# Altium PCB PCB1.PcbDoc
Units mm, origin at the board's own origin, x right, y up, seen from the top; angles counter-clockwise.
Board outline 42 x 41 mm, 4 copper layers (L1(SIGNAL), L2(GRD), L3(GND), L4 (SIGNAL)), stack 1.57 mm thick; 35 components, 27 nets, 169 pads, 0 vias.
Unrouted connection lines stored in the file: 53.
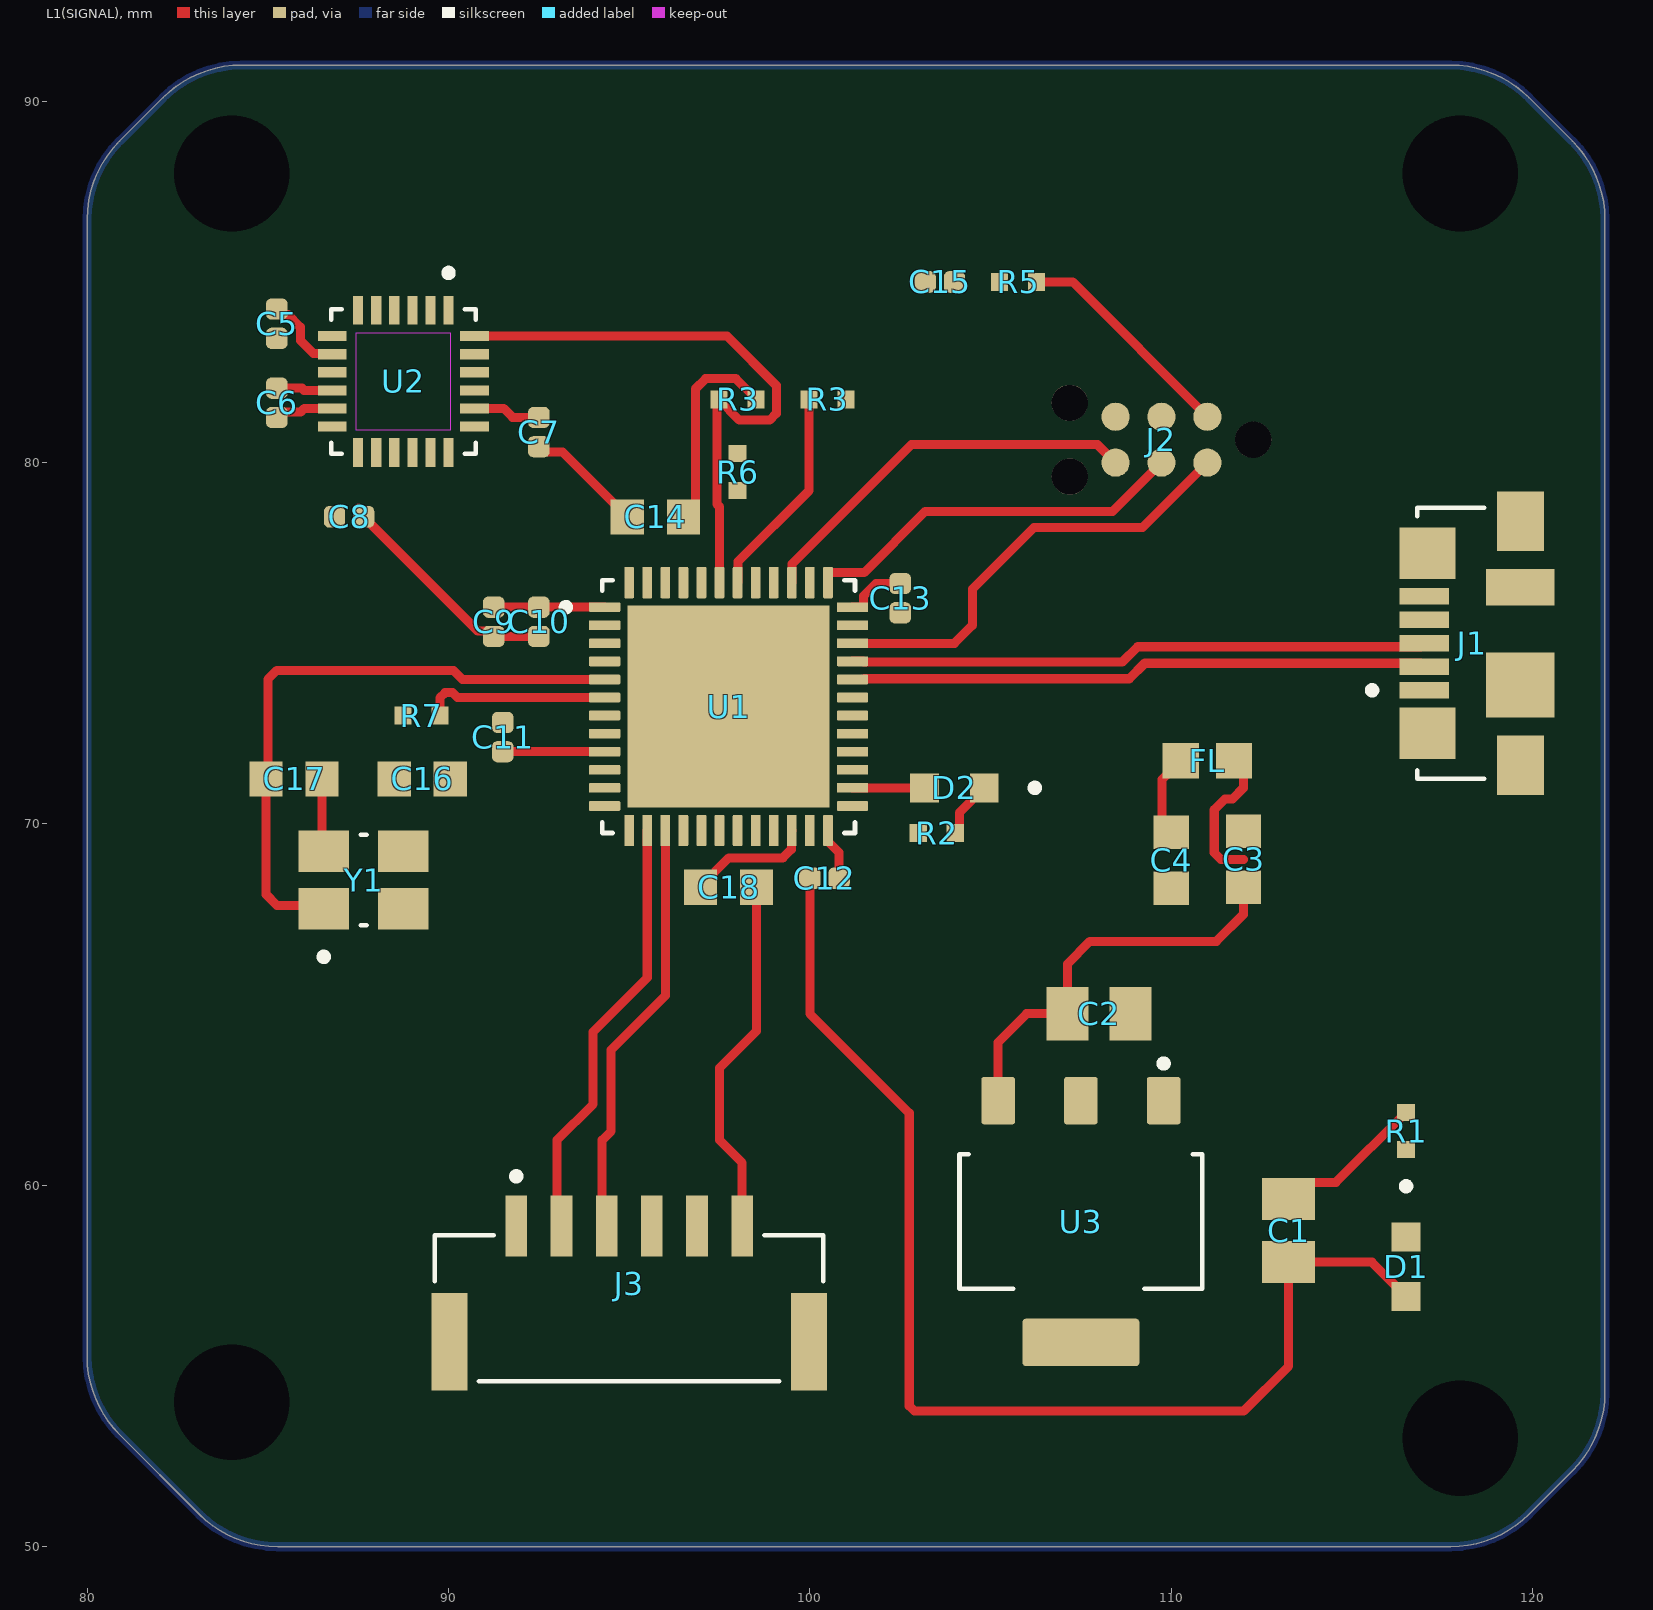
[diagram p0: L1(SIGNAL) view]
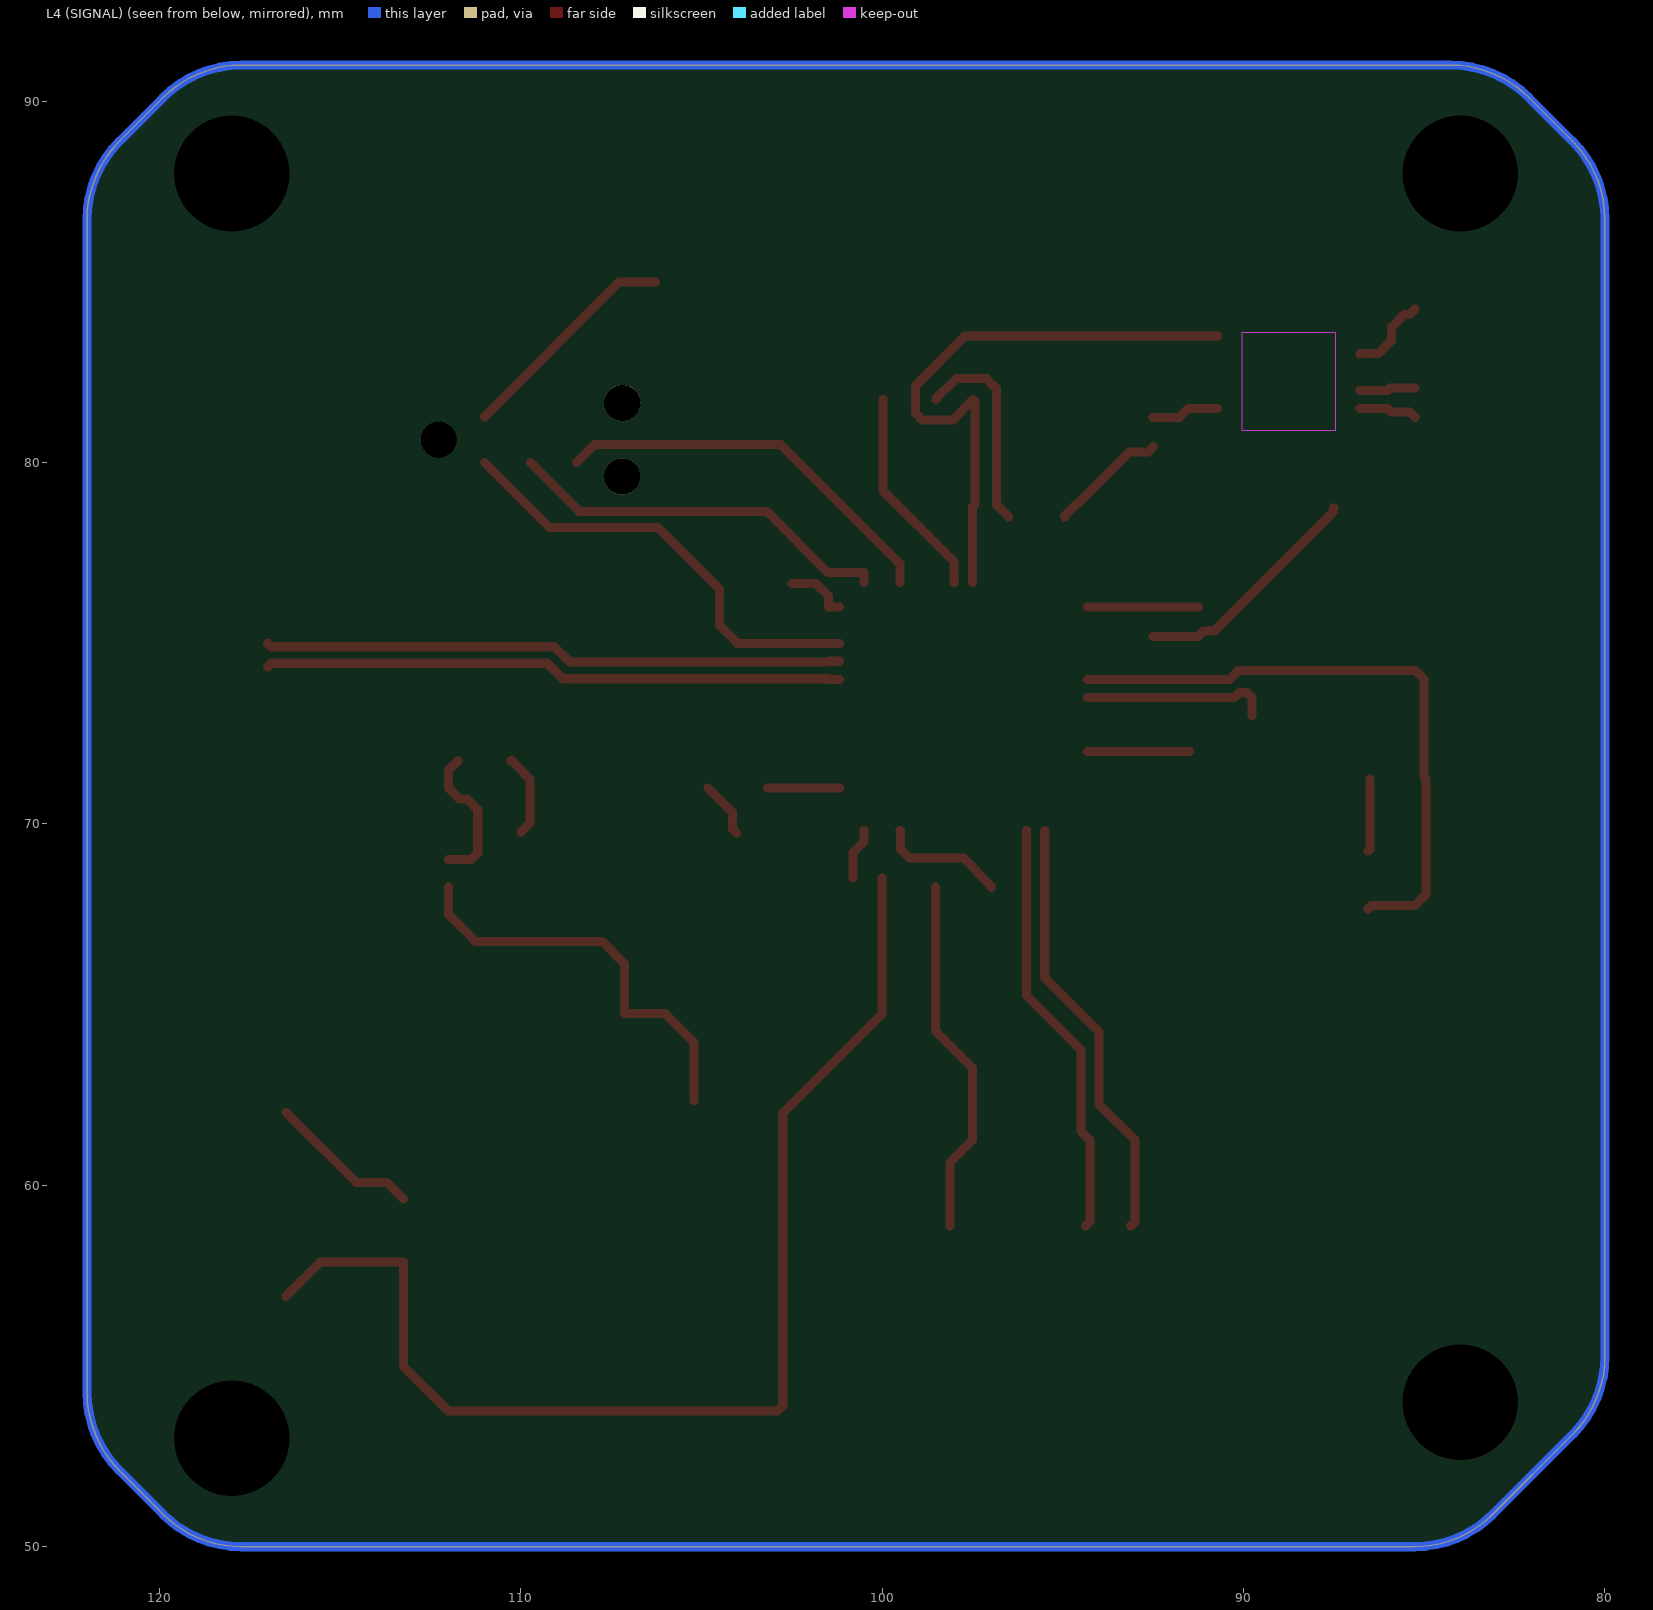
[diagram p1: L4 (SIGNAL) view, seen from below]

## Layer stack, top to bottom
Top Solder: solder mask 0.0254, SM-001, Dk 4
L1(SIGNAL): signal copper 0.035
Dielectric 1: prepreg 0.2, PP-017, Dk 4.6
L2(GRD): signal copper 0.0175
Dielectric 3: core 1.065, Core-039, Dk 4.6
L3(GND): signal copper 0.0175
Dielectric 5: prepreg 0.2, PP-017, Dk 4.6
L4 (SIGNAL): signal copper 0.035
Bottom Solder: solder mask 0.0254, SM-001, Dk 4

## Board outline
80.898,53.102 cw(c83.066,55.27) 80,55.27 80,86.73 cw(c83.066,86.73) 80.898,88.898 82.102,90.102 cw(c84.27,87.934) 84.27,91 117.73,91 cw(c117.73,87.934) 119.898,90.102 121.102,88.898 cw(c118.934,86.73) 122,86.73 122,54.27 cw(c118.934,54.27) 121.102,52.102 119.898,50.898 cw(c117.73,53.066) 117.73,50 85.27,50 cw(c85.27,53.066) 83.102,50.898

## Design rules (kind name [scope] priority, off if disabled: settings)
Clearance [All] p1: gap=0.2 ignorepadtopadclearanceinfootprint=FALSE
DiffPairsRouting [All] p1: maxlimit=0.254 minlimit=0.203 mostfreqgap=0.254 toplayer_maxgap=0.203 toplayer_prefgap=0.203 toplayer_minwidth=0.26 toplayer_maxwidth=0.26 toplayer_prefwidth=0.26 bottomlayer_maxgap=0.203 bottomlayer_prefgap=0.203 bottomlayer_minwidth=0.26 bottomlayer_maxwidth=0.26 bottomlayer_prefwidth=0.26 impedanceprofiledriven=TRUE impedanceprofileid={26B8F111-8DEA-43AA-B8F9-D71FA04D63BC} impedanceprofilevalue=90.000000 maxuncoupledlength=12.7
PolygonConnect [All] p1: connectstyle=Direct reliefconductorwidth=0.254 reliefentries=4 polygonreliefangle="90 Angle" airgapwidth=0.254
RoutingVias [All] p1: holewidth=0.3 width=0.7 viastyle="Through Hole" minholewidth=0.25 minwidth=0.55 maxholewidth=0.4 maxwidth=0.9
SolderMaskExpansion [All] p1: expansion=0.102 istentingtop=FALSE
SupplyNets "Schematic Supply Nets_4" [InNet('LED PWR K')] p1: voltage=0.000
SupplyNets "Schematic Supply Nets_3" [InNet('+3V3')] p2: voltage=0.000
SupplyNets "Schematic Supply Nets_1" [InNet('VBUS')] p3: voltage=0.000
SupplyNets "Schematic Supply Nets" [InNet('+5')] p4: voltage=0.000
UnRoutedNet [All] p1: checkbadconnections=TRUE
Width [All] p1: maxlimit=1 minlimit=0.2 preferedwidth=0.3 midlayer1_minwidth=0.254 midlayer1_maxwidth=0.254 midlayer1_prefwidth=0.254 midlayer2_minwidth=0.254 midlayer2_maxwidth=0.254 midlayer2_prefwidth=0.254 minimp=50.000000 maximp=50.000000 favimp=50.000000
28 further rules are at their usual default settings.

## Classes and differential pairs
differential pair class *DEF-USB: USB_D
differential pair USB_D: +USB_D_P -USB_D_N

## Components (designator, comment, footprint, x,y, rotation, side; value= is the part's Value field where it differs from the comment)
C1 "22U" CAPC2012X88N 113.25,58.75 r90 top
C2 "22U" CAPC2012X88N 108,64.75 r0 top
C3 "2u2" CAPC1608X90N 112,69.025 r90 top
C4 "2u2" CAPC1608X90N 110,69 r270 top
C5 "10n" CAPC1005X55N 85.25,83.845 r90 top
C6 "100n" CAPC1005X55N 85.25,81.655 r90 top
C7 "2n2" CAPC1005X55N 92.5,80.845 r270 top
C8 "100n" CAPC1005X55N 87.25,78.5 r0 top
C9 "2u2" CAPC1005X55N 91.25,75.595 r270 top
C10 "100n" CAPC1005X55N 92.5,75.595 r270 top
C11 "100n" CAPC1005X55N 91.5,72.405 r90 top
C12 "100n" CAPC1005X55N 100.405,68.5 r180 top
C13 "100n" CAPC1005X55N 102.5,76.25 r270 top
C14 "100n" CAPC1608X90N 95.725,78.5 r180 top
C15 "100n" CAPC1005X55N 103.595,85 r180 top
C16 "10p" CAPC1608X90N 89.275,71.25 r180 top
C17 "10p" CAPC1608X90N 85.725,71.25 r180 top
C18 "2u2" CAPC1608X90N 97.75,68.25 r180 top
D1 "KPT-1608EC" LED_KPT-1608EC 116.5,57.75 r270 top
D2 "KPT-1608EC" LED_KPT-1608EC 104,71 r180 top
FL "130R" BEADC1608X95N 111,71.75 r180 top
J1 "47346-0001" MOLEX_47346-0001 119.66,75 r90 top
J2 "TC2030-MCP-NL" TC2030-MCP-NL 111,81.27 r180 top
J3 "SM06B-GHS-TB" JST_SM06B-GHS-TB 95,57 r0 top
R1 "1k" RES_ERJU02F3600X 116.5,61.5 r270 top
R2 "1k" RES_ERJU02F3600X 103.512,69.75 r0 top
R3 "2K2" RES_ERJU02F3600X 100.488,81.75 r0 top
R3 "2K2" RES_ERJU02F3600X 98,81.75 r0 top
R5 "10K" RES_ERJU02F3600X 105.762,85 r0 top
R6 "10K" RES_ERJU02F3600X 98,79.738 r270 top
R7 "0" RES_ERJU02F3600X 89.25,73 r180 top
U1 "STM32F411CEU6" QFN50P700X700X60-49N 97.75,73.25 r0 top
U2 "MPU-6050-A" QFN50P400X400X95-24N 88.75,82.25 r270 top
U3 "AMS1117-3.3" SOT229P700X180-4N 107.5,59 r180 top
Y1 "24MHz" XTAL_TSX-3225_24.0000MF15V-C0 87.65,68.45 r90 top

## Footprints (in the part's own frame and the unit in brackets; to place one, negate y for a bottom-side part, rotate by r counter-clockwise, add the part's x,y. Pads: shape width x height; smd on the part's side, far side on the other; paste and mask are expansions set on the pad)
BEADC1608X95N [mm]
  rect 1x0.97 smd: 1(-0.735,0) 2(0.735,0)
CAPC1005X55N [mm]
  rrect53% 0.59x0.6 smd: 1(-0.405,0) 2(0.405,0)
  body extent -0.5,-0.25 0.5,0.25, height 0.55
CAPC1608X90N [mm]
  rect 0.92x0.97 smd: 1(-0.775,0) 2(0.775,0)
  body extent -0.8,-0.4 0.8,0.4, height 0.95
CAPC2012X88N [mm]
  rect 1.16x1.47 smd: 1(-0.875,0) 2(0.875,0)
  body extent -1.02,-0.64 1.02,0.64, height 1.4
JST_SM06B-GHS-TB [mm]
  rect 0.6x1.7 smd paste+0 mask+0.102: 1(-3.125,1.875) 2(-1.875,1.875) 3(-0.625,1.875) 4(0.625,1.875) 5(1.875,1.875) 6(3.125,1.875)
  rect 1x2.7 smd paste+0 mask+0.102: MP1(-4.975,-1.325) MP2(4.975,-1.325)
  silkscreen extent -5.38,-2.42 5.38,3.35, body extent -5.38,-2.05 5.38,2.8, height 4.25
LED_KPT-1608EC [mm]
  rect 0.8x0.8 smd paste+0 mask+0.102: A(0.825,0) C(-0.825,0)
  silkscreen extent -2.32,-0.1 -2.13,0.1, body extent -0.8,-0.4 0.8,0.4, height 0.75
MOLEX_47346-0001 [mm]
  rect 0.45x1.38 smd: 1(-1.3,2.66) 2(-0.65,2.66) 3(0,2.66) 4(0.65,2.66) 5(1.3,2.66)
  rect 1.425x1.55 smd: S1(-2.488,2.575) S2(2.488,2.575)
  rect 1.65x1.3 smd: S3(-3.375,0) S6(3.375,0)
  rect 1.8x1.9 smd: S4(-1.15,0)
  rect 1x1.9 smd: S5(1.55,0)
  silkscreen extent -3.75,1 3.75,4.2
QFN50P400X400X95-24N [mm]
  rect 0.79x0.28 smd: 1(-1.97,1.25) 2(-1.97,0.75) 3(-1.97,0.25) 4(-1.97,-0.25) 5(-1.97,-0.75) 6(-1.97,-1.25) 13(1.97,-1.25) 14(1.97,-0.75) 15(1.97,-0.25) 16(1.97,0.25) 17(1.97,0.75) 18(1.97,1.25)
  rect 0.28x0.79 smd: 7(-1.25,-1.97) 8(-0.75,-1.97) 9(-0.25,-1.97) 10(0.25,-1.97) 11(0.75,-1.97) 12(1.25,-1.97) 19(1.25,1.97) 20(0.75,1.97) 21(0.25,1.97) 22(-0.25,1.97) 23(-0.75,1.97) 24(-1.25,1.97)
  Keep-Out Layer region: 1.35,-1.3 -1.35,-1.3 -1.35,1.3 1.35,1.3
  silkscreen extent -3.1,-2 2,2
QFN50P700X700X60-49N [mm]
  rrect25% 0.87x0.27 smd: 1(-3.43,2.75) 2(-3.43,2.25) 3(-3.43,1.75) 4(-3.43,1.25) 5(-3.43,0.75) 6(-3.43,0.25) 7(-3.43,-0.25) 8(-3.43,-0.75) 9(-3.43,-1.25) 10(-3.43,-1.75) 11(-3.43,-2.25) 12(-3.43,-2.75) 25(3.43,-2.75) 26(3.43,-2.25) 27(3.43,-1.75) 28(3.43,-1.25) 29(3.43,-0.75) 30(3.43,-0.25) 31(3.43,0.25) 32(3.43,0.75) 33(3.43,1.25) 34(3.43,1.75) 35(3.43,2.25) 36(3.43,2.75)
  rrect25% 0.27x0.87 smd: 13(-2.75,-3.43) 14(-2.25,-3.43) 15(-1.75,-3.43) 16(-1.25,-3.43) 17(-0.75,-3.43) 18(-0.25,-3.43) 19(0.25,-3.43) 20(0.75,-3.43) 21(1.25,-3.43) 22(1.75,-3.43) 23(2.25,-3.43) 24(2.75,-3.43) 37(2.75,3.43) 38(2.25,3.43) 39(1.75,3.43) 40(1.25,3.43) 41(0.75,3.43) 42(0.25,3.43) 43(-0.25,3.43) 44(-0.75,3.43) 45(-1.25,3.43) 46(-1.75,3.43) 47(-2.25,3.43) 48(-2.75,3.43)
  rect 5.6x5.6 smd paste-4: 49(0,0)
  silkscreen extent -4.6,-3.5 3.5,3.5
RES_ERJU02F3600X [mm]
  rect 0.475x0.5 smd: 1(-0.512,0) 2(0.512,0)
SOT229P700X180-4N [mm]
  rrect15% 0.93x1.31 smd: 1(-2.29,-3.345) 2(0,-3.345) 3(2.29,-3.345)
  rrect15% 3.24x1.31 smd: 4(0,3.345)
  silkscreen extent -3.36,-4.47 3.36,1.86, body extent -3.5,-3.15 3.5,3.15, height 1.8
TC2030-MCP-NL [mm]
  round 0.78 smd paste-1: 1(0,0) 2(0,1.27) 3(1.27,0) 4(1.27,1.27) 5(2.54,0) 6(2.54,1.27)
  round 1 hole 1 unplated: ""(-1.27,0.635) ""(3.81,-0.385) ""(3.81,1.655)
XTAL_TSX-3225_24.0000MF15V-C0 [mm]
  rect 1.15x1.4 smd: 1(-0.8,1.1) 2(-0.8,-1.1) 3(0.8,-1.1) 4(0.8,1.1)
  silkscreen extent -2.22,-0.08 1.25,1.2, body extent -1.25,-1.6 1.25,1.6, height 0.6

## Part data
C1 C2: library part C0805C475K4PACTU, "4.7 ÂµF Â±10% 16V Ceramic Capacitor X5R 0805 (2012 Metric)", Package="0805 Kemet", Check_prices=https://www.snapeda.com/parts/C0805C475K4PACTU/KEMET/view-part/?ref=eda, MF=KEMET, MP=C0805C475K4PACTU, SnapEDA_Link=https://www.snapeda.com/parts/C0805C475K4PACTU/KEMET/view-part/?ref=snap
C3 C4 C14 C16 C17 C18: library part C0603C104J4RAC, "0.1 ÂµF Â±5% 16V Ceramic Capacitor X7R 0603 (1608 Metric)", Package="603-2 KEMET", Check_prices=https://www.snapeda.com/parts/C0603C104J4RAC/KEMET/view-part/?ref=eda, MF=KEMET, MP=C0603C104J4RAC, SnapEDA_Link=https://www.snapeda.com/parts/C0603C104J4RAC/KEMET/view-part/?ref=snap
C5 C6 C7 C8 C9 C10 C11 C12 C13 C15: library part C0402C103K4RAC, "10000 pF Â±10% 16V Ceramic Capacitor X7R 0402 (1005 Metric)", Package="402-2 KEMET", Check_prices=https://www.snapeda.com/parts/C0402C103K4RAC/KEMET/view-part/?ref=eda, MF=KEMET, MP=C0402C103K4RAC, SnapEDA_Link=https://www.snapeda.com/parts/C0402C103K4RAC/KEMET/view-part/?ref=snap
D1 D2: "Red Chip LED 1.6x0.8mm", Package=Package, Check_prices=https://www.snapeda.com/parts/KPT-1608EC/Kingbright/view-part/?ref=eda, MF=Kingbright, MP=KPT-1608EC, SnapEDA_Link=https://www.snapeda.com/parts/KPT-1608EC/Kingbright/view-part/?ref=snap
FL: library part BLM18AG471SN1D, "470 Ohms @ 100MHz 1 Ferrite Bead 0603 (1608 Metric) 500mA 350mOhm", Package="1608 Murata", Arrow_Electronics-Purchase-URL=https://snapeda.com/shop?store=Arrow+Electronics&id=282295, Arrow_Europe-Purchase-URL=https://snapeda.com/shop?store=Arrow+Europe&id=282295, Availability=Good, DigiKey-Purchase-URL=https://snapeda.com/shop?store=DigiKey&id=282295, MF="Murata Electronics", Mouser-Purchase-URL=https://snapeda.com/shop?store=Mouser&id=282295, MP=BLM18AG471SN1D, Price=None, SnapEDA_Link=https://www.snapeda.com/parts/BLM18AG471SN1D/Murata/view-part/282295/?ref=snap
J1: "Conn Data USB Micro B w/Flange SMT Bottom Mnt LF", Package=None, Check_prices=https://www.snapeda.com/parts/47346-0001/Molex/view-part/?ref=eda, MF=Molex, MP=47346-0001, SnapEDA_Link=https://www.snapeda.com/parts/47346-0001/Molex/view-part/?ref=snap
J2: "MPLABÂ® REAL ICE, ICD 3, PICkit 3, PICkit 2 Plug-Of-Nailsâ„¢ Adapter Cable", Package=None, Check_prices=https://www.snapeda.com/parts/TC2030-MCP-NL/Tag-Connect/view-part/?ref=eda, MF="Tag-Connect LLC", MP=TC2030-MCP-NL, SnapEDA_Link=https://www.snapeda.com/parts/TC2030-MCP-NL/Tag-Connect/view-part/?ref=snap
J3: "Connector Header Surface Mount, Right Angle 6 position 0.049 (1.25mm)", Package=None, Check_prices=https://www.snapeda.com/parts/SM06B-GHS-TB/JST/view-part/?ref=eda, MF="JST Sales", MP=SM06B-GHS-TB, SnapEDA_Link=https://www.snapeda.com/parts/SM06B-GHS-TB/JST/view-part/?ref=snap
R1 R2 R3 R3 R5 R6 R7: library part ERJU02F3600X, Package=None, Availability=Unavailable, MP=ERJU02F3600X, Price=None
U1: "High-performance access line, ARM Cortex-M4 core with DSP and FPU, 512 Kbytes Flash, 100 MHz CPU, ART Accelerator", Package=None, Availability=Unavailable, MP=STM32F411CEU6, Price=None
U2: Package=None, Check_prices=https://www.snapeda.com/parts/MPU-6050-A/InvenSense/view-part/?ref=eda, MF="TDK InvenSense", MP=MPU-6050-A, SnapEDA_Link=https://www.snapeda.com/parts/MPU-6050-A/InvenSense/view-part/?ref=snap
U3: "Linear Voltage Regulator IC Positive Fixed 1 Output 1A SOT-223-3L", Package="SOT-223-3L UMW", Check_prices=https://www.snapeda.com/parts/AMS1117-3.3/UMW/view-part/?ref=eda, MF=UMW, MP=AMS1117-3.3, SnapEDA_Link=https://www.snapeda.com/parts/AMS1117-3.3/UMW/view-part/?ref=snap
Y1: library part TSX-3225_24.0000MF15V-C0, "24 MHz Â±10ppm Crystal 18pF 40 Ohms 4-SMD, No Lead", Package="NON STANDARD-4 EPSON", Check_prices=https://www.snapeda.com/parts/TSX-3225%2024.0000MF15V-C0/EPSON/view-part/?ref=eda, Digi-Key_Part_Number=SER4209TR-ND, MF=EPSON, MP="TSX-3225 24.0000MF15V-C0", Purchase-URL="https://pricing.snapeda.com/search/part/TSX-3225 24.0000MF15V-C0/?ref=eda", SnapEDA_Link=https://www.snapeda.com/parts/TSX-3225%2024.0000MF15V-C0/EPSON/view-part/?ref=snap

## Free pads (board coordinates)
  round 1.524 hole 3.2: 1(84,54) 1(84,88) 1(118,53) 1(118,88)

## Nets (pads, with @x,y where several pads share a name; then routed paths per layer and width w, separated by ;. In a path a pad name is that pad's centre, name@x,y a point inside that pad or via, vN(x,y) a via of type N, cw(c..) or ccw(c..) an arc to the next point about the centre after c; other vN are vias at no path point)
+3V3: C1.1 C5.2 C8.2 C9.2 C10.2 C11.2 C12.2 C13.2 C14.1 D1.A J2.1 J3.1 R3.2 R5.2 U2.8 U2.13 U3.2 | length 54.1
  L1(SIGNAL) w0.25: C5.2 85.401,84.099 85.554,84.099 85.902,83.751 85.902,83.383 86.27,83.015 86.765,83.015 U2.8 ; C8.2@87.5,78.75 87.504,78.746 87.504,78.651 C8.2 87.655,78.495 90.809,75.341 91.099,75.341 C9.2 C10.2 ; C14.1 96.835,78.835 96.835,82.044 97.116,82.325 97.949,82.325 98.512,81.762 R3.2@98.512,81.75 ; C12.2 100,64.75 102.75,62 102.75,53.896 102.896,53.75 112,53.75 113.25,55 C1.1 115.55,57.875 D1.A ; R5.2 107.27,85 J2.1
+5: C2.1 C3.1 FL.1 U3.3 | length 15.4
  L1(SIGNAL) w0.25: U3.3 105.21,63.96 106,64.75 C2.1 107.125,66.125 107.75,66.75 111.25,66.75 112,67.5 C3.1 ; FL.1 112,71.485 112,71 111.697,70.697 111.493,70.697 111.19,70.395 111.19,69.205 111.38,69.015 112,69.015
"IMU INT": U1.45 U2.12
"IMU SCL": R3.1@99.976,81.75 U1.42 U2.23 | length 5.9
  L1(SIGNAL) w0.25: U1.42 98.01,76.69 98.01,77.26 99.976,79.226 R3.1@99.976,81.75
"IMU SDA": R3.1@97.488,81.75 U1.43 U2.24 | length 16.7
  L1(SIGNAL) w0.25: U2.24 97.709,83.5 99.075,82.135 99.075,81.365 98.884,81.175 98.05,81.175 97.488,81.737 97.488,81.75 97.425,81.687 97.425,78.854 97.5,78.779 U1.43
"LED PWR K": C1.2 C2.2 C3.2 C4.2 C5.1 C6.1 C7.2 C8.1 C9.1 C10.1 C11.1 C12.1 C13.1 C14.2 C15.2 C16.1 C17.1 C18.1 J1.5 J2.5 J3.6 R1.1 R2.1 R6.1 U1.1 U1.8 U1.9 U1.23 U1.24 U1.35 U1.36 U1.47 U1.48 U1.49 U2.1 U2.9 U2.11 U2.18 U3.1 Y1.2 Y1.4 | length 30.3
  L1(SIGNAL) w0.25: C6.1 85.401,81.401 85.911,81.401 86.01,81.5 U2.11 ; C17.1 86.5,69.3 Y1.4 ; C9.1 C10.1 U1.1 ; C11.1 U1.9 ; C7.2 92.651,80.289 93.161,80.289 94.59,78.86 94.615,78.86 94.95,78.525 C14.2 ; J3.6 98.125,60.625 97.5,61.25 97.5,63.25 98.525,64.275 C18.1 ; U1.24 100.5,69.52 100.81,69.21 C12.1 ; U1.36 101.48,76 101.49,76.01 101.49,76.31 101.835,76.655 C13.1 ; C1.2 113.705,60.08 114.556,60.08 116.488,62.012 R1.1
"MCU BOOT0": C17.2 R6.2 U1.5 U1.44 Y1.1 | length 17.3
  L1(SIGNAL) w0.25: Y1.1 86.45,67.75 85.25,67.75 84.95,68.05 C17.2 85,71.3 85,74 85.25,74.25 90.136,74.25 90.386,74 U1.5
"MCU_LED C": D2.A U1.26 | length 2
  L1(SIGNAL) w0.25: U1.26 D2.A
NetC6_2: C6.2 U2.10 | length 1.6
  L1(SIGNAL) w0.25: C6.2 85.944,82.06 86.004,82 U2.10
NetC7_1: C7.1 U2.20 | length 1.9
  L1(SIGNAL) w0.25: U2.20 91.526,81.5 91.776,81.25 C7.1
NetC15_1: C15.1 R5.1 U1.7
NetC16_2: C16.2 R7.2 Y1.3
NetC18_2: C18.2 U1.22 | length 3.5
  L1(SIGNAL) w0.25: C18.2 96.975,68.275 97.76,69.06 97.93,69.06 98.25,69.06 98.75,69.06 99.25,69.06 99.49,69.3 99.49,69.81 U1.22
NetD1_C: D1.C R1.2
NetD2_C: D2.C R2.2 | length 1.6
  L1(SIGNAL) w0.25: R2.2 104.136,69.862 104.136,70.312 D2.C
NetR7_1: R7.1 U1.6 | length 5.2
  L1(SIGNAL) w0.25: R7.1 89.762,73.488 89.908,73.634 90.116,73.634 90.25,73.5 U1.6
NRST: J2.3
PA4: J3.2 U1.14 | length 12
  L1(SIGNAL) w0.25: J3.2 93,59 93,61.25 94,62.25 94,64.25 95.5,65.75 U1.14
PA5: J3.3 U1.15 | length 11.7
  L1(SIGNAL) w0.25: J3.3 94.25,59 94.25,61.25 94.5,61.5 94.5,63.75 96,65.25 U1.15
PA6: J3.4 U1.16
PA7: J3.5 U1.17
SWCLCK: J2.4 U1.37 | length 10.8
  L1(SIGNAL) w0.25: U1.37 100.5,76.946 100.51,76.956 101.5,76.956 103.193,78.649 108.379,78.649 J2.4
SWDIO: J2.2 U1.34 | length 12.5
  L1(SIGNAL) w0.25: U1.34 104,75 104.5,75.5 104.5,76.5 106.199,78.199 109.199,78.199 J2.2
SWO: J2.6 U1.39 | length 11
  L1(SIGNAL) w0.25: U1.39 99.51,76.69 99.51,77.2 102.81,80.5 107.96,80.5 J2.6
USB_D_N: J1.2 U1.32 | length 16
  L1(SIGNAL) w0.26: U1.32 101.48,74 101.498,74.018 108.838,74.018 109.263,74.443 116.907,74.443 J1.2
USB_D_P: J1.3 U1.33 | length 16
  L1(SIGNAL) w0.26: U1.33 101.48,74.5 101.498,74.482 108.646,74.482 109.071,74.907 116.907,74.907 J1.3
VBUS: C4.1 FL.2 J1.1 | length 2.3
  L1(SIGNAL) w0.25: C4.1 109.75,70.025 109.75,71.235 109.89,71.375 109.89,71.39 110.25,71.75 FL.2
pads on no net: J1.4 J1.S1 J1.S2 J1.S3 J1.S4 J1.S5 J1.S6 J2. J3.MP1 J3.MP2 U1.2 U1.3 U1.4 U1.10 U1.11 U1.12 U1.13 U1.18 U1.19 U1.20 U1.21 U1.25 U1.27 U1.28 U1.29 U1.30 U1.31 U1.38 U1.40 U1.41 U1.46 U2.2 U2.3 U2.4 U2.5 U2.6 U2.7 U2.14 U2.15 U2.16 U2.17 U2.19 U2.21 U2.22 U3.4
copper on no net: | length 157.3
  L4 (SIGNAL) w0.254: 80,55.27 ccw(c83.066,55.27) 80.898,53.102 83.102,50.898 ccw(c85.27,53.066) 85.27,50 117.73,50 ccw(c117.73,53.066) 119.898,50.898 121.102,52.102 ccw(c118.934,54.27) 122,54.27 122,86.73 ccw(c118.934,86.73) 121.102,88.898 119.898,90.102 ccw(c117.73,87.934) 117.73,91 84.27,91 ccw(c84.27,87.934) 82.102,90.102 80.898,88.898 ccw(c83.066,86.73) 80,86.73 80,55.27

## Text inside footprints (layer, text, board x,y; h text height)
J1: Mechanical 13 "PCB EDGE" at 120.91,79.5 h0.41 r90